# Altium PCB GateWay-NRF-version.PcbDoc
Units mm, origin at the board's own origin, x right, y up, seen from the top; angles counter-clockwise.
Board outline 119.76 x 151.64 mm, 2 copper layers (Top Layer, Bottom Layer); 41 components, 49 nets, 192 pads, 15 vias.
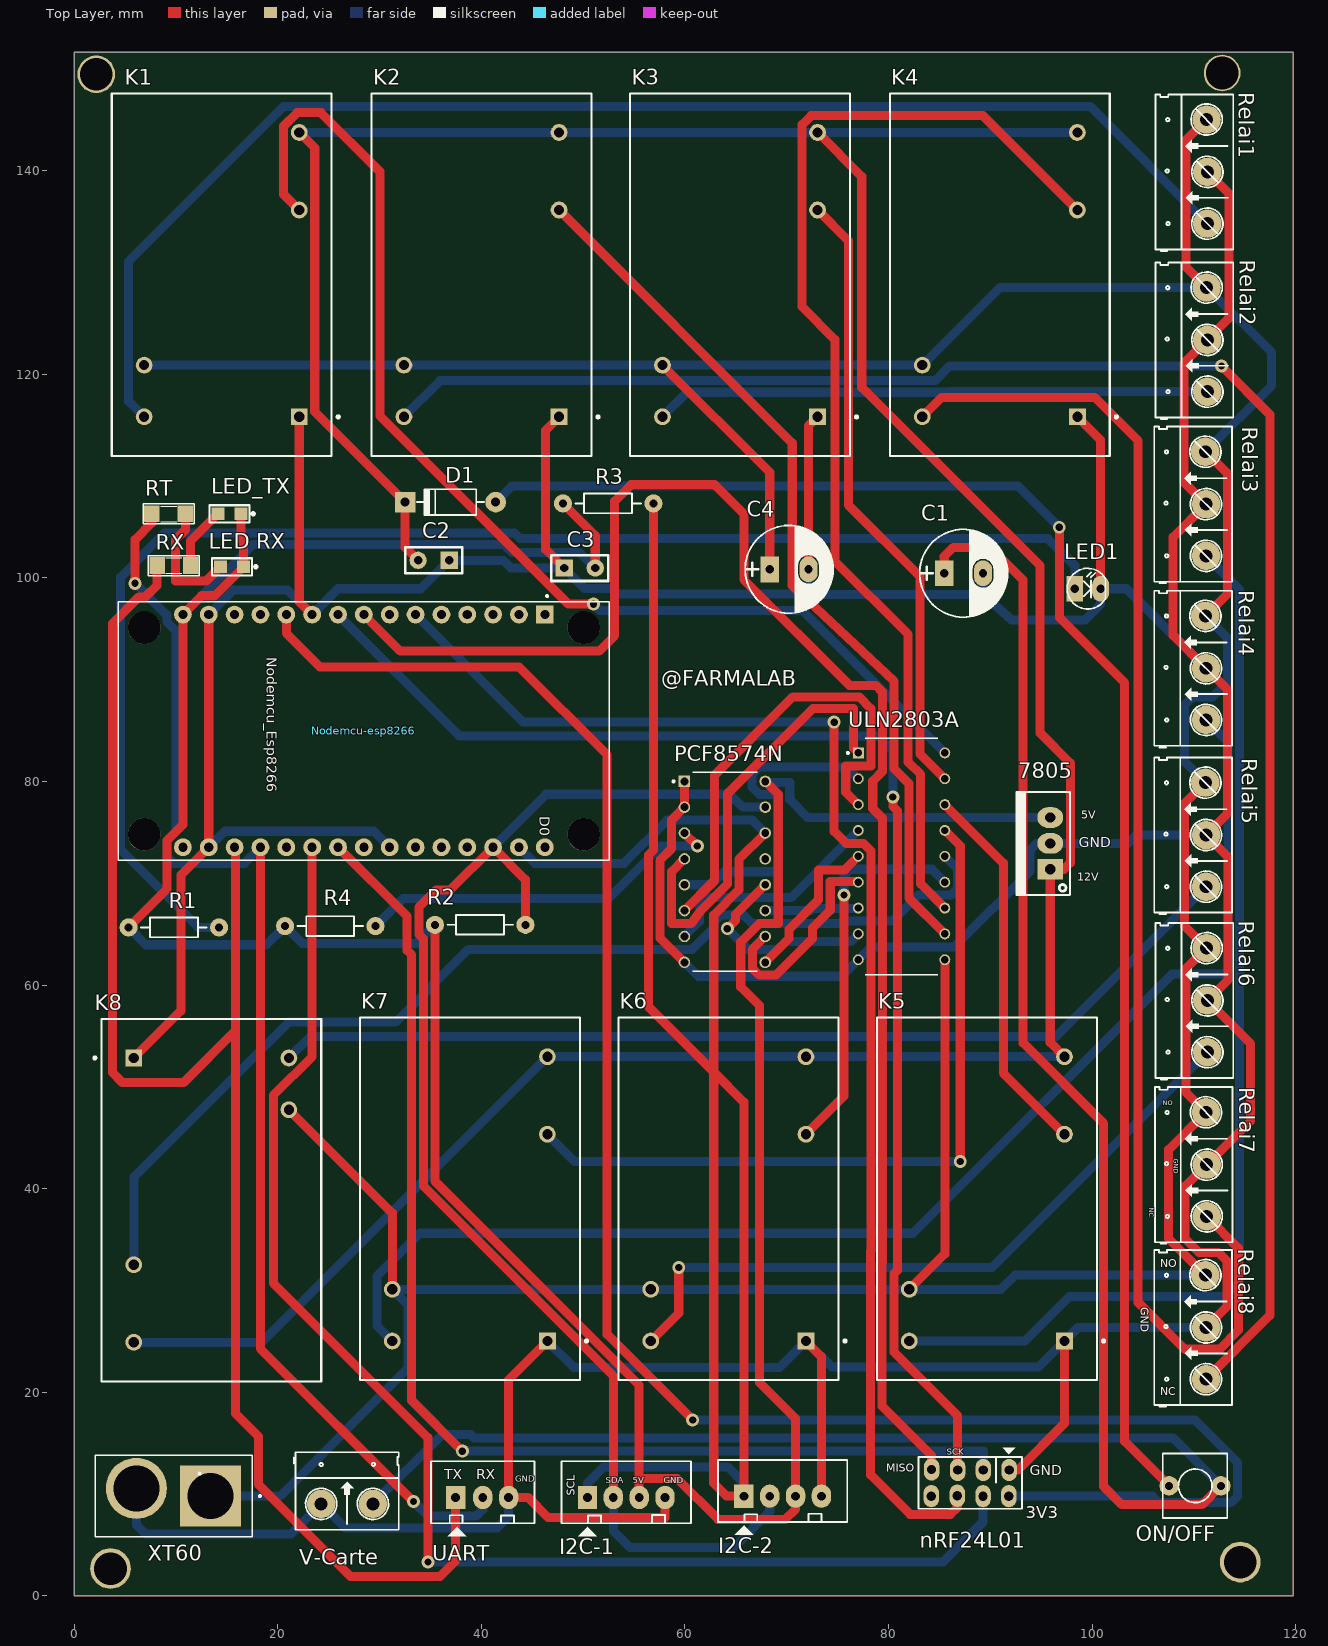
[diagram p0: Top Layer view]
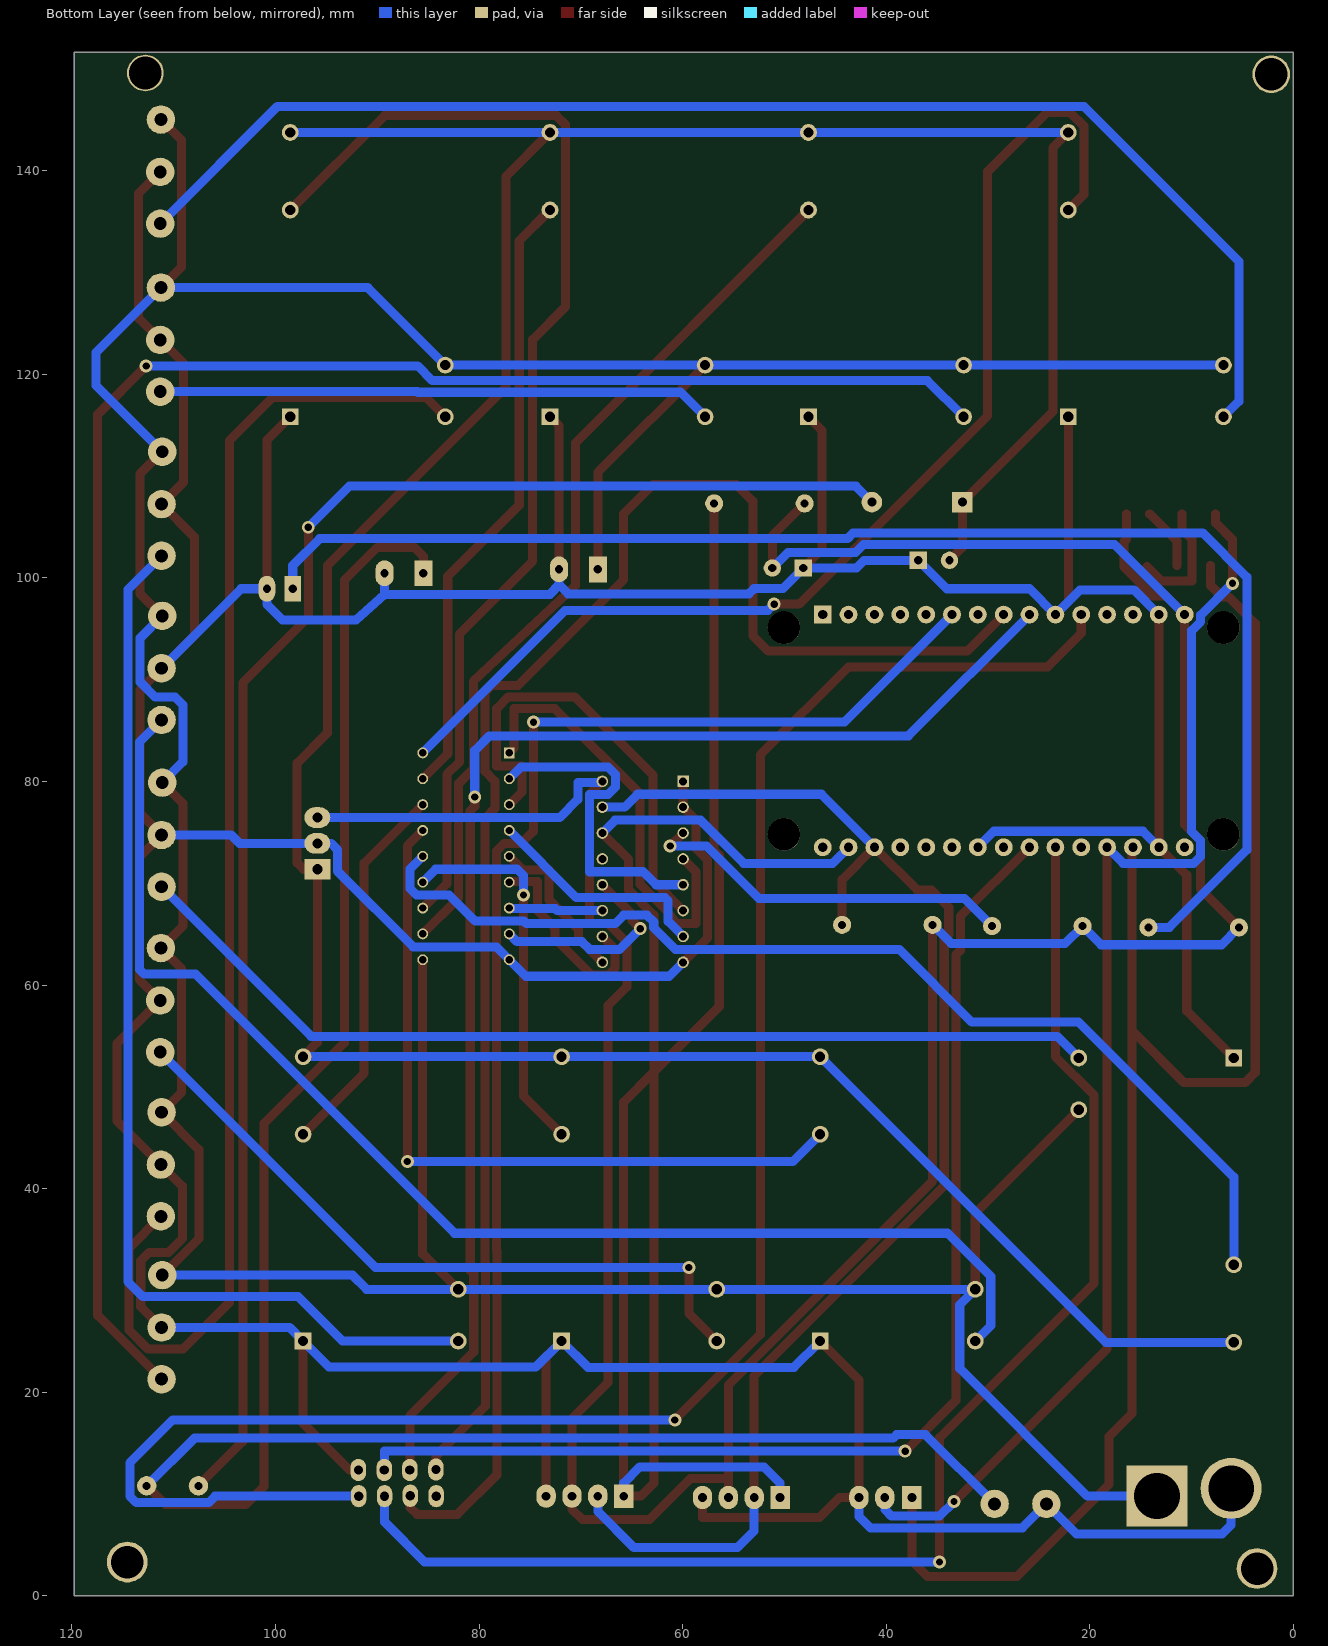
[diagram p1: Bottom Layer view, seen from below]
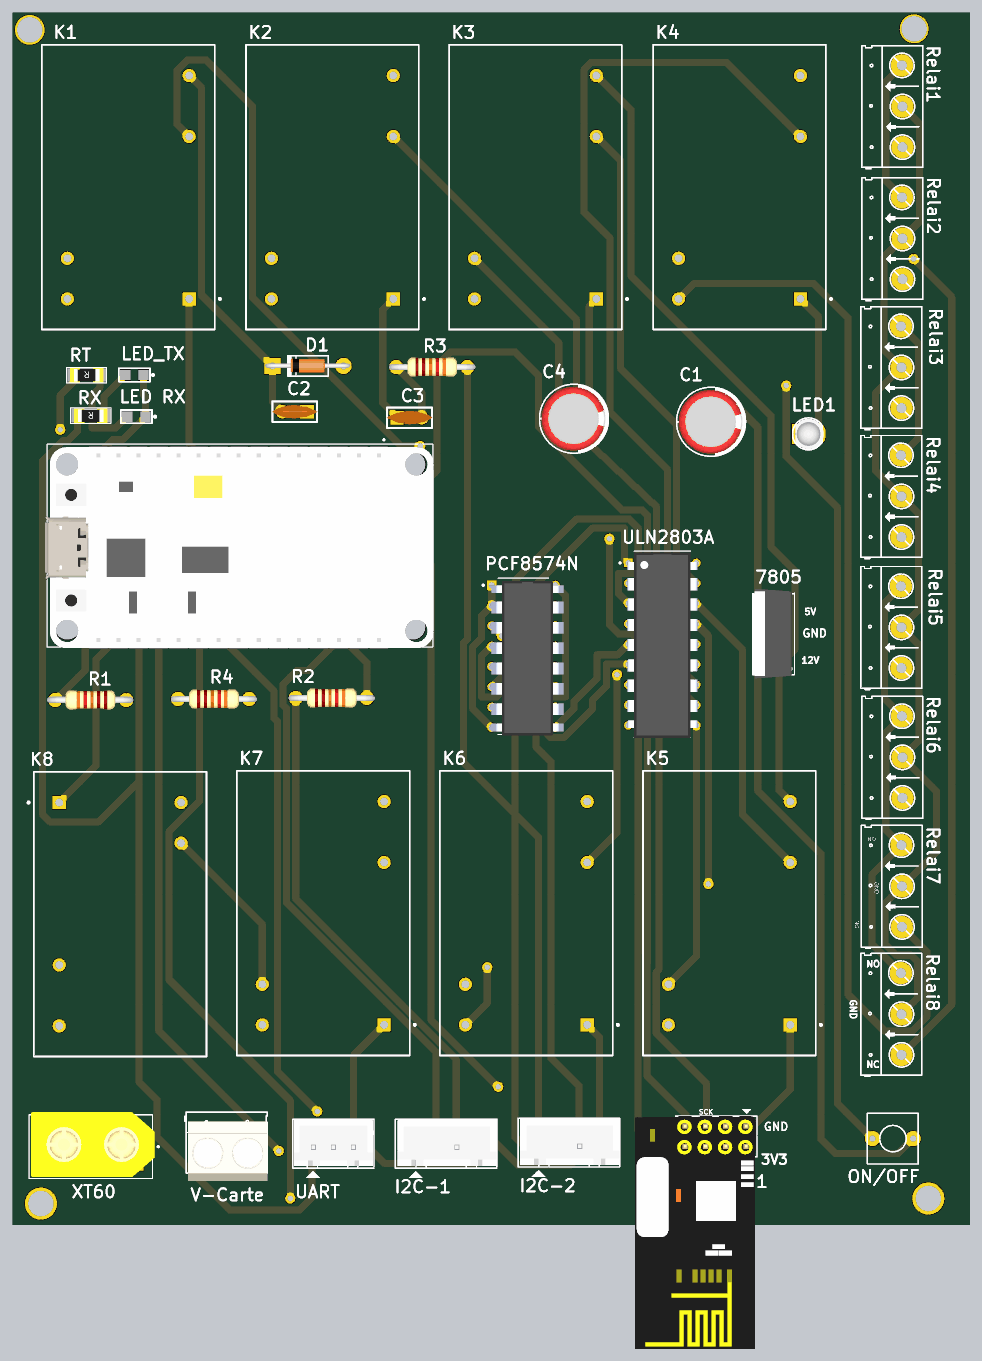
[diagram p2: 3D render of the assembled board from above, using the file's embedded part models]

## Layer stack, top to bottom
Top Solder: solder mask 0.0102, Solder Resist, Dk 3.5
Top Layer: signal copper 0.0356
Dielectric 1: dielectric 0.32, FR-4, Dk 4.8
Bottom Layer: signal copper 0.0356
Bottom Solder: solder mask 0.0102, Solder Resist, Dk 3.5

## Board outline
0,0 119.761,0 119.761,151.638 0,151.638

## Design rules (kind name [scope] priority, off if disabled: settings)
Clearance [All] p1: gap=0.254 ignorepadtopadclearanceinfootprint=FALSE except(0: Arc-Hole Track-Hole SMDPad-Hole THPad-Hole Via-Hole Fill-Hole Poly-Hole Region-Hole Text-Hole)
PolygonConnect [All] p1: connectstyle=Relief reliefconductorwidth=0.254 reliefentries=4 polygonreliefangle="90 Angle" airgapwidth=0.254
RoutingVias [All] p1: holewidth=0.711 width=1.27 viastyle="Through Hole" minholewidth=0.711 minwidth=1.27 maxholewidth=0.711 maxwidth=1.27
SolderMaskExpansion [All] p1: expansion=0.102
Width [All] p1: maxlimit=1.016 minlimit=0.635 preferedwidth=0.889
30 further rules are at their usual default settings.

## Classes and differential pairs
component class GateWay-NRF-version: 7805 C1 C2 C3 C4 D1 I2C-1 I2C-2 LED1 ON/OFF PCF8574N R1 R2 R3 R4 ULN2803A V-Carte XT60
component class GateWay-NRF-version-puissance: K1 K2 K3 K4 K5 K6 K7 K8 Relai1 Relai2 Relai3 Relai4 Relai5 Relai6 Relai7 Relai8
component class GateWay-NRF-version-commande: "LED RX" LED_TX Nodemcu-esp8266 nRF24L01 RT RX UART

## Components (designator, comment, footprint, x,y, rotation, side; value= is the part's Value field where it differs from the comment)
7805 "LM7805" QTO-220 95.885,71.374 r90 top
C1 "1000uF/16V" CP1.5/3.4 85.471,100.457 r0 top
C2 "Cap Non-pol" "Cap Non-Pol 3mm" 35.306,101.727 r180 top value=0.33uF
C3 "Cap Non-pol" "Cap Non-Pol 3mm" 49.657,100.965 r0 top value=0.1uF
C4 "1000uF/16V" CP1.5/3.4 68.326,100.838 r0 top
D1 "1N4007" D1A 41.402,107.442 r0 top
I2C-1 "I2C" CON4 50.419,9.652 r0 top value="Connector 4"
I2C-2 "I2C" CON4 65.786,9.779 r0 top value="Connector 4"
K1 "Relay" MODULE5B 14.478,129.794 r90 top
K2 "Relay" MODULE5B 40.005,129.794 r90 top
K3 "Relay" MODULE5B 65.405,129.794 r90 top
K4 "Relay" MODULE5B 90.932,129.794 r90 top
K5 "Relay" MODULE5B 89.662,38.989 r90 top
K6 "Relay" MODULE5B 64.262,38.989 r90 top
K7 "Relay" MODULE5B 38.862,38.989 r90 top
K8 "Relay" MODULE5B 13.462,38.862 r270 top
LED1 "LED" LED-3 98.298,98.933 r0 top value="LED 3 ly Single Colour"
"LED RX" "LED3" LED0805 15.494,101.092 r180 top
LED_TX "LED3" LED0805 15.24,106.299 r180 top
Nodemcu-esp8266 "ZC563900" *MODULE_ZC563900 28.448,84.963 r270 top
nRF24L01 "nRF24L01" nRF24L01 88.024,11.087 r180 top
ON/OFF "ON/OFF" SW2 112.649,10.795 r180 top value="SW chip 2 pin" (schematic designator ON/OFF1)
PCF8574N "PCF8574N" *DIP794W45P254L1969H508Q16 63.914,71.12 r0 top
R1 "560" R1/4W 5.334,65.659 r0 top value="R1/4W - 1K"
R2 "4.7k" R1/4W 44.323,65.913 r180 top value="R1/4W - 1K"
R3 "4.7k" R1/4W 56.896,107.315 r180 top value="R1/4W - 1K"
R4 "10k" R1/4W 29.591,65.786 r180 top value="R1/4W - 1K"
Relai1 "Header 3" HED3 111.319,134.807 r90 top
Relai2 "Header 3" HED3 111.319,118.297 r90 top
Relai3 "Header 3" HED3 111.192,102.168 r90 top
Relai4 "Header 3" HED3 111.192,86.039 r90 top
Relai5 "Header 3" HED3 111.192,69.656 r90 top
Relai6 "Header 3" HED3 111.319,53.4 r90 top
Relai7 "Header 3" HED3 111.258,37.271 r90 top
Relai8 "Header 3" HED3 111.192,21.269 r90 top
RT "220" SM-1206 9.271,106.299 r180 top value="R1/4W - 1K"
RX "220" SM-1206 9.779,101.219 r180 top value="R1/4W - 1K"
UART "UART" CON3 37.592,9.652 r0 top value="Connector 3"
ULN2803A "ULN2803A" *DIP850W46P254L2324H393Q18 81.28,72.644 r0 top
V-Carte "Header 2" HED2 24.257,9.017 r0 top
XT60 "XT60_YELLOW" *AMASS_XT60PB-M 9.779,9.779 r180 top

## Footprints (in the part's own frame and the unit in brackets; to place one, negate y for a bottom-side part, rotate by r counter-clockwise, add the part's x,y. Pads: shape width x height; smd on the part's side, far side on the other; paste and mask are expansions set on the pad)
*AMASS_XT60PB-M [mm]
  rect 6x6 hole 4.5: 1(-3.6,0)
  round 6 hole 4.5: 2(3.683,-0.762)
  silkscreen extent -8.55,-4 7.7,4, body extent -8,-4.32 7.5,4.06, height 16
*DIP794W45P254L1969H508Q16 [mm]
  rect 1.13x1.13 hole 0.78: 1(-3.97,8.89)
  round 1.13 hole 0.78: 2(-3.97,6.35) 3(-3.97,3.81) 4(-3.97,1.27) 5(-3.97,-1.27) 6(-3.97,-3.81) 7(-3.97,-6.35) 8(-3.97,-8.89) 9(3.97,-8.89) 10(3.97,-6.35) 11(3.97,-3.81) 12(3.97,-1.27) 13(3.97,1.27) 14(3.97,3.81) 15(3.97,6.35) 16(3.97,8.89)
  silkscreen extent -5.13,-9.77 3.18,9.77, body extent -4.95,-9.91 5.97,9.4, height 4.57
*DIP850W46P254L2324H393Q18 [mm]
  rect 1.07x1.07 hole 0.72: 1(-4.25,10.16)
  round 1.07 hole 0.72: 2(-4.25,7.62) 3(-4.25,5.08) 4(-4.25,2.54) 5(-4.25,0) 6(-4.25,-2.54) 7(-4.25,-5.08) 8(-4.25,-7.62) 9(-4.25,-10.16) 10(4.25,-10.16) 11(4.25,-7.62) 12(4.25,-5.08) 13(4.25,-2.54) 14(4.25,0) 15(4.25,2.54) 16(4.25,5.08) 17(4.25,7.62) 18(4.25,10.16)
  silkscreen extent -5.38,-11.62 3.55,11.62, body extent -4.37,-11.75 4.38,11.49, height 3.93
*MODULE_ZC563900 [mil]
  rect 69x69 hole 35: 1(-450,700)
  round 69 hole 35: 2(-450,600) 3(-450,500) 4(-450,400) 5(-450,300) 6(-450,200) 7(-450,100) 8(-450,0) 9(-450,-100) 10(-450,-200) 11(-450,-300) 12(-450,-400) 13(-450,-500) 14(-450,-600) 15(-450,-700) 16(450,-700) 17(450,-600) 18(450,-500) 19(450,-400) 20(450,-300) 21(450,-200) 22(450,-100) 23(450,0) 24(450,100) 25(450,200) 26(450,300) 27(450,400) 28(450,500) 29(450,600) 30(450,700)
  round 125.98 hole 125.98 unplated: None(-400,850) None(-400,-850) None(400,850) None(400,-850)
  silkscreen extent -526,-950 500,950, body extent -490,-960 510,954, height 190
"Cap Non-Pol 3mm" [mil] "Capacitor, Radial; Body 5.6 x 2.5 mm (L x W typ); Pin Spacing 3 mm (typ); Solder Pad 35mil"
  rect 67x67 hole 32: 1(-60,0)
  round 67 hole 32: 2(60,0)
  silkscreen extent -110,-50 110,50, body extent -115,-33 115,34, height 245
CON3 [mil] "CON 3"
  rect 75x90 hole 34: 1(-5,0)
  oval 75x90 hole 34: 2(100,0) 3(200,0)
  silkscreen extent -100,-150 300,140, body extent -95,-90 295,136, height 276
CON4 [mil] "CON4"
  rect 75x90 hole 34: 1(0,0)
  oval 75x90 hole 34: 2(100,0) 3(200,0) 4(300,0)
  silkscreen extent -100,-150 400,140, body extent -90,-90 398,136, height 276
CP1.5/3.4 [mil] "Tu hoa 220->470uF,16V, 470uF/16V,25V"
  rect 70x100 hole 32: 1(0,0)
  oval 70x100 hole 32: 2(150,0)
  silkscreen extent -95,-170 245,170, body extent -85,-157 230,157, height 446
D1A [mil] "Diode 1A, W 100mil, L 350mil"
  round 80 hole 35: 1(0,0)
  rect 80x80 hole 35: 2(-350,0)
  silkscreen extent -305,-50 -45,50, body extent -386,-33 34,36, height 84
HED2 [mil] "Header 2, 2 pin, hight 300mil, Pin to Pin 200, Colour Green"
  round 110 hole 50: 1(0,0) 2(200,0)
  silkscreen extent -106,-100 300,200, body extent -92,-140 302,155, height 394
HED3 [mil] "Header 3, 3 pin, hight 300mil, Pin to Pin 200, Colour Green"
  round 110 hole 50: 1(0,0) 2(200,0) 3(402.62,2.62)
  silkscreen extent -106,-100 500,200
LED0805 [mil] "Chip Resistor; Body 2.0 x 1.3 mm (LxW typ)"
  rect 50x50 smd: 1(-45,0) 2(45,0)
  silkscreen extent -97,-33 77,33, body extent -60,-25 60,25, height 47
LED-3 [mil] "LED 2 PIN, 3ly Only colour"
  rect 65x100 hole 32: 1(0,0)
  oval 65x100 hole 32: 2(100,0)
  silkscreen extent -29,-78 118,79, body extent -13,-75 125,75, height 217
MODULE5B [mm] "DIP; 5 Round Pins; Row Space 15.24 mm; Pitch 2.54 mm"
  rect 1.65x1.65 hole 1: 1(-13.97,-7.62)
  round 1.65 hole 1: 2(-13.97,7.62) 3(-8.89,7.62) 4(13.97,-7.62) 5(6.35,-7.62)
  silkscreen extent -17.8,-11.58 17.8,10.8, body extent -17.8,-10.8 17.8,10.8, height 14
nRF24L01 [mil] "Connector 4x2"
  oval 60x86 hole 36: 1(-150.5,-49.5) 2(-149.5,51.5) 3(-50.5,-49.5) 4(-49.5,51.5) 5(48.5,-49.5) 6(50,50) 7(149.5,-51.5) 8(150.5,51.5)
  silkscreen extent -200,-135 200,101, body extent -197,-100 399,1048, height 407
QTO-220 [mil] "TO-220 - 1-2-3"
  rect 80x100 hole 39: 1(0,0)
  oval 80x100 hole 39: 2(100,0) 3(200,0)
  silkscreen extent -100,-76 300,130, body extent -119,-64 322,121, height 755
R1/4W [mil] "R 1/4W, 2 Pin, 350mil"
  round 70 hole 31: 1(0,0) 2(350,0)
  silkscreen extent 48,-38 302,38, body extent -40,-47 386,47, height 111
SM-1206 [mil] "Compoment SMD 120x60mil"
  rect 60x65 smd: 1(-65,0) 2(65,0)
  silkscreen extent -99,-38 99,39, body extent -83,-35 83,36, height 25
SW2 [mil] "SW button 2pin, 250x 250 mil"
  round 75 hole 31: 1(0,0) 2(200,0)
  silkscreen extent -25,-125 225,125

## Part data
7805: library part LM78xx_1, "On ap +, from + 5 to + 24VDC", =LM7808
C1 C4: library part CP4, "Cap 1000uF/16V - 220uF/50V", Description 1="2200uF-3300uF/6,3V - 1000uF-2200uF/10V", Description 2="1000uF/16V - 470uF => 1000uF/25V - 100uF/100V", Description 3=330uF>470uF/35V_220uF>470uF/50V_10uF>22uF/250V, Description 4="220uF => 330uF/63V - 10uF =>33uF/160 - 200V", Description 5="4,7uF>10uF/250V_3,3uF>10uF/400V - 2,2uF>4,7uF/450V"
C2 C3: "Non-polarized Capacitor", LatestRevisionDate=17-Jul-2002, LatestRevisionNote="Re-released for DXP Platform.", PackageReference=RAD-0.3, Published=8-Jun-2000, Publisher="Altium Limited"
D1: library part D1A, "Diode 1A"
I2C-1 I2C-2: library part Con4, "Connector 4"
K1 K2 K3 K4 K5 K6 K7 K8: "SPDT Relay", LatestRevisionDate=17-Jul-2002, LatestRevisionNote="Re-released for DXP Platform.", PackageReference=MODULE5B, Published=8-Jun-2000, Publisher="Altium Limited"
LED1: "LED Single colour Green and Red"
"LED RX" LED_TX: library part LEDSMD, "LED 3mm"
Nodemcu-esp8266: "NodeMcu Lua ESP8266 WIFI Internet of Things Network Development Module Board", Package=None, Availability=Unavailable, MF=YKS, MP=ZC563900, Price=None, SnapEDA_Link=https://www.snapeda.com/parts/ZC563900/YKS/view-part/607853/?ref=snap
ON/OFF: library part SW2, "Switch button 2 pin"
PCF8574N: "Remote 8-Bit I/O Expander for I2C-Bus 16-PDIP -40 to 85", Package="PDIP-16 Texas Instruments", Availability=Good, BuyPart=https://www.snapeda.com/parts/PCF8574N/Texas%20Instruments/view-part/271889/?ref=eda, DigiKey-Purchase-URL=https://snapeda.com/shop?store=DigiKey&id=271889, MF="Texas Instruments", Mouser-Purchase-URL=https://snapeda.com/shop?store=Mouser&id=271889, MP=PCF8574N, Price=None, SnapEDA_Link=https://www.snapeda.com/parts/PCF8574N/Texas%20Instruments/view-part/271889/?ref=snap, Texas_Instruments-Purchase-URL=https://snapeda.com/shop?store=Texas+Instruments&id=271889
R1 R2 R3 R4: library part R1/4W, "Resistor 1/4W"
Relai1 Relai2 Relai3 Relai4 Relai5 Relai6 Relai7 Relai8: library part Hed3, "Header 3 (Green)"
RT RX: library part R, "Resistor 1/4W"
UART: library part Con3, "Connector 3"
ULN2803A: "Bipolar (BJT) Transistor Array 8 NPN Darlington 50V 500mA 2.25W Through Hole 18-DIP", Package="DIP-18 STMicroelectronics", BuyPart=https://www.snapeda.com/parts/ULN2803A/STMicroelectronics/view-part/697285/?ref=eda, Digi-Key_Part_Number=497-2356-5-ND, MF=STMicroelectronics, MP=ULN2803A, SnapEDA_Link=https://www.snapeda.com/parts/ULN2803A/STMicroelectronics/view-part/697285/?ref=snap
V-Carte: library part Hed2, "Header 2 (Green)"
XT60: library part XT60, "Power connector; 65A; PIN: 2; Colour: yellow-Male", Package=None, Availability=Unavailable, MF=Pololu, MP="XT60 YELLOW", Price=None, SnapEDA_Link=https://www.snapeda.com/parts/XT60%20YELLOW/Pololu/view-part/423230/?ref=snap

## Free pads (board coordinates)
  round 4 hole 3.2: 10(114.554,3.302) 13(3.556,2.667)
  round 3.6 hole 3.2: 11(112.776,149.606)
  round 3.7 hole 3.2: 12(2.159,149.479)

## Via types
v1: diameter 1.27, hole 0.711, Top Layer to Bottom Layer, 15 vias

## Nets (pads, with @x,y where several pads share a name; then routed paths per layer and width w, separated by ;. In a path a pad name is that pad's centre, name@x,y a point inside that pad or via, vN(x,y) a via of type N, cw(c..) or ccw(c..) an arc to the next point about the centre after c; other vN are vias at no path point)
3V3: Nodemcu-esp8266.11 nRF24L01.2 | length 188.7
  Top Layer w0.889: Nodemcu-esp8266.11 20.828,94.564 24.13,91.262 43.688,91.262 52.349,82.601 52.349,25.679 v1(60.757,17.272)
  Bottom Layer w0.889: v1(60.757,17.272) 110.084,17.272 114.3,13.056 114.3,9.779 113.665,9.144 106.553,9.144 105.918,9.779 nRF24L01.2
5V: 7805.3 "LED RX.1" C3.2 I2C-1.3 I2C-2.3 LED_TX.1 Nodemcu-esp8266.15 PCF8574N.16 R1.1 R2.2 R3.2 R4.2 | length 320.5
  Top Layer w0.889: R1.1 9.093,69.418 9.093,74.185 10.668,75.76 Nodemcu-esp8266.15 12.522,98.247 13.792,98.247 16.637,101.092 16.637,103.556 16.383,103.81 LED_TX.1 ; R2.2 35.433,40.742 55.499,20.676 55.499,11.506 ; R3.2 51.181,104.14 C3.2 ; I2C-1.3 55.499,11.506 ; PCF8574N.16 69.164,78.73 69.164,66.04 67.31,66.04 65.477,64.207 65.477,59.823 67.335,57.965 67.335,20.93 70.866,17.399 I2C-2.3 70.866,8.509 69.85,7.493 63.246,7.493 59.233,11.506 55.499,11.506
  Bottom Layer w0.889: R1.1 7.036,63.957 18.872,63.957 R4.2 22.403,64.084 33.604,64.084 R2.2 ; Nodemcu-esp8266.15 17.551,103.276 42.24,103.276 43.002,102.514 49.632,102.514 C3.2 ; PCF8574N.16 68.017,79.877 70.291,79.877 70.291,78.238 72.074,76.454 7805.3
12V: 7805.1 C2.2 D1.2 K1.4 K2.4 K3.4 K4.4 K5.4 K6.4 K7.4 K8.4 | length 329.7
  Top Layer w0.889: K1.4 23.622,142.24 23.622,116.332 D1.2 32.512,102.997 C2.2 ; K3.4 77.368,139.421 77.368,118.72 94.894,101.194 94.894,84.76 97.866,81.788 97.866,72.009 97.231,71.374 7805.1 95.885,54.356 K5.4
  Bottom Layer w0.889: K8.4 18.415,24.892 K7.4 K6.4 K5.4 ; K1.4 K2.4 K3.4 K4.4
12V6: C4.1 K1.3 K2.3 K3.3 K4.3 K5.3 K6.3 K7.3 K8.3 Relai1.3 Relai2.3 Relai3.3 Relai4.3 Relai5.3 Relai6.3 Relai7.3 Relai8.3 ULN2803A.10 XT60.1 | length 434.6
  Top Layer w0.889: K8.3 31.242,37.592 K7.3 ; K3.3 68.326,110.363 C4.1 ; K5.3 85.53,33.587 ULN2803A.10 ; Relai8.3 111.1,31.496 107.518,35.077 107.518,43.825 Relai7.3 109.22,49.47 109.22,61.595 Relai6.3 109.093,65.786 109.093,77.851 Relai5.3 ; Relai4.3 113.309,98.45 113.309,110.211 Relai3.3 ; Relai2.3 109.22,130.556 109.22,143.002 Relai1.3
  Bottom Layer w0.889: K1.3 K2.3 K3.3 K4.3 90.932,128.524 Relai2.3 117.627,122.149 117.627,118.897 Relai3.3 ; XT60.1 20.218,9.779 32.766,22.327 32.766,28.575 K7.3 K6.3 K5.3 91.034,30.099 92.431,31.496 Relai8.3 ; Relai5.3 109.093,81.915 109.093,87.528 109.855,88.29 111.811,88.29 113.309,89.789 113.309,94.082 Relai4.3
CE: Nodemcu-esp8266.22 nRF24L01.3 | length 117.4
  Top Layer w0.889: Nodemcu-esp8266.22 32.703,66.739 32.703,63.398 33.147,62.954 33.147,19.177 v1(38.125,14.199)
  Bottom Layer w0.889: v1(38.125,14.199) 89.306,14.199 nRF24L01.3
CSN: Nodemcu-esp8266.21 nRF24L01.4 | length 136.8
  Top Layer w0.889: Nodemcu-esp8266.21 23.368,52.959 19.558,49.149 19.558,30.709 34.747,15.519 v1(34.747,3.302)
  Bottom Layer w0.889: v1(34.747,3.302) 85.344,3.302 89.281,7.239 nRF24L01.4
D0: Nodemcu-esp8266.30
D3: Nodemcu-esp8266.27
D4: Nodemcu-esp8266.26
D5: Nodemcu-esp8266.23
GND: 7805.2 C1.2 C2.1 C3.1 C4.2 I2C-1.4 I2C-2.4 K1.1 K2.1 K3.1 K4.1 K5.1 K6.1 K7.1 K8.1 LED1.2 Nodemcu-esp8266.10 Nodemcu-esp8266.14 Nodemcu-esp8266.17 Nodemcu-esp8266.24 nRF24L01.1 PCF8574N.1 PCF8574N.2 PCF8574N.8 Relai1.2 Relai2.2 Relai3.2 Relai4.2 Relai5.2 Relai6.2 Relai7.2 Relai8.2 UART.3 ULN2803A.9 V-Carte.1 XT60.2 | length 640.3
  Top Layer w0.889: K8.1 10.465,57.455 10.465,70.79 Nodemcu-esp8266.17 Nodemcu-esp8266.14 ; K1.1 22.098,97.663 Nodemcu-esp8266.10 ; K7.1 42.672,21.209 UART.3 44.577,9.652 46.533,7.696 58.039,7.696 I2C-1.4 ; K2.1 46.304,114.503 46.304,102.794 C3.1 ; PCF8574N.8 57.537,64.637 57.537,72.257 58.674,73.393 58.674,76.2 PCF8574N.2 PCF8574N.1 ; K6.1 73.406,23.495 I2C-2.4 ; C4.2 72.136,114.935 K3.1 ; nRF24L01.1 92.71,12.344 97.282,16.916 K5.1 ; K4.1 100.838,113.538 LED1.2 ; Relai8.2 113.233,28.391 113.233,32.893 112.395,33.731 110.49,33.731 109.144,35.077 109.144,40.237 Relai7.2 115.57,46.663 115.57,54.229 Relai6.2 113.36,60.522 113.36,72.568 Relai5.2 113.309,76.854 113.309,89.002 Relai4.2 107.953,94.358 107.953,104.01 Relai3.2 109.017,109.423 109.017,121.076 Relai2.2 113.436,125.495 113.436,137.77 Relai1.2
  Bottom Layer w0.889: XT60.2 6.096,6.96 6.985,6.071 21.311,6.071 V-Carte.1 26.607,6.667 41.542,6.667 42.672,7.798 UART.3 ; Nodemcu-esp8266.17 14.783,75.108 29.413,75.108 Nodemcu-esp8266.24 ; Nodemcu-esp8266.14 15.646,98.831 20.93,98.831 Nodemcu-esp8266.10 25.908,98.933 34.036,98.933 C2.1 42.164,101.727 42.926,100.965 C3.1 50.152,98.946 52.959,98.946 53.48,98.425 71.247,98.425 72.136,99.314 ; K7.1 49.073,22.428 69.291,22.428 K6.1 74.447,22.454 94.717,22.454 K5.1 98.613,26.35 Relai8.2 ; PCF8574N.8 61.316,60.858 75.404,60.858 ULN2803A.9 78.3,63.754 86.462,63.754 93.904,71.196 93.904,73.279 94.539,73.914 7805.2 103.53,73.914 104.353,74.737 Relai5.2 ; C4.2 72.136,99.314 ; C1.2 89.281,98.374 ; Relai4.2 103.378,98.933 LED1.2 100.838,97.409 99.289,95.86 92.1,95.86 89.281,98.374 ; 72.136,99.314 73.025,98.374 89.281,98.374
MISO: Nodemcu-esp8266.8 nRF24L01.7 | length 158.4
  Top Layer w0.889: Nodemcu-esp8266.8 32.029,92.812 51.562,92.812 53.086,94.336 53.086,107.544 54.712,109.169 62.916,109.169 65.786,106.299 65.786,99.822 76.162,89.446 78.74,89.446 79.407,88.78 79.407,80.994 78.448,80.035 78.448,77.343 79.407,76.384 79.407,32.766 79.375,32.734 79.375,18.618 84.226,13.767 nRF24L01.7
MOSI: Nodemcu-esp8266.6 nRF24L01.6 | length 133.5
  Top Layer w0.889: v1(74.653,85.827) 74.653,75.105 75.844,73.914 77.521,73.914 78.264,73.171 78.264,33.909 78.232,33.877 78.232,11.874 82.118,7.988 86.081,7.988 86.754,8.661 nRF24L01.6
  Bottom Layer w0.889: Nodemcu-esp8266.6 44.094,85.827 v1(74.653,85.827)
NetC1_1: C1.1 ON/OFF.1 V-Carte.2 | length 204.7
  Top Layer w0.889: C1.1 85.471,102.108 86.36,102.997 89.992,102.997 93.218,99.771 93.218,54.305 101.117,46.406 101.117,10.744 102.921,8.941 110.795,8.941 ON/OFF.1
  Bottom Layer w0.889: V-Carte.2 36.153,15.833 38.966,15.833 39.305,15.494 107.95,15.494 ON/OFF.1
NetD1_1: D1.1 ON/OFF.2 | length 156.4
  Top Layer w0.889: v1(96.774,104.978) 96.774,96.114 103.2,89.687 103.2,15.164 ON/OFF.2
  Bottom Layer w0.889: D1.1 42.977,109.017 92.735,109.017 v1(96.774,104.978)
NetK1_2: K1.2 Relai1.1 | length 133
  Bottom Layer w0.889: K1.2 5.334,117.348 5.334,131.089 20.574,146.329 99.797,146.329 Relai1.1
NetK2_2: K2.2 Relai8.1 | length 186.5
  Top Layer w0.889: Relai8.1 117.475,27.553 117.475,116.053 v1(112.7,120.828)
  Bottom Layer w0.889: K2.2 35.941,119.38 84.582,119.38 86.03,120.828 v1(112.7,120.828)
NetK3_2: K3.2 Relai2.1 | length 54.6
  Bottom Layer w0.889: K3.2 60.198,118.237 85.979,118.237 86.039,118.298 Relai2.1
NetK4_2: K4.2 Relai7.1 | length 133.4
  Top Layer w0.889: K4.2 85.217,117.729 100.254,117.729 104.521,113.462 104.521,28.804 109.093,24.232 112.522,24.232 114.376,26.086 114.376,34.153 Relai7.1
NetK5_2: K5.2 Relai3.1 | length 107.6
  Bottom Layer w0.889: K5.2 93.396,25.019 97.765,29.388 113.03,29.388 114.503,30.861 114.503,98.857 Relai3.1
NetK6_2: K6.2 Relai6.1 | length 69.1
  Top Layer w0.889: K6.2 59.385,27.762 v1(59.385,32.233)
  Bottom Layer w0.889: v1(59.385,32.233) 90.151,32.233 Relai6.1
NetK7_2: K7.2 Relai4.1 | length 128.5
  Bottom Layer w0.889: K7.2 29.718,26.543 29.718,31.369 33.96,35.611 82.398,35.611 107.848,61.062 112.878,61.062 113.36,61.544 113.36,83.871 Relai4.1
NetK8_2: K8.2 Relai5.1 | length 97.1
  Bottom Layer w0.889: K8.2 23.209,54.959 96.494,54.959 Relai5.1
NetLED1_1: LED1.1 R1.2 | length 138.8
  Bottom Layer w0.889: R1.2 12.167,65.659 4.547,73.279 4.547,100.076 8.89,104.419 43.237,104.419 43.796,103.861 95.656,103.861 98.298,101.219 LED1.1
"NetLED RX_2": "LED RX.2" RT.1 | length 12
  Top Layer w0.889: RT.1 10.922,104.75 9.957,103.784 9.957,99.695 12.954,99.695 14.351,101.092
NetLED_TX_2: LED_TX.2 RX.1 | length 6.2
  Top Layer w0.889: RX.1 11.43,103.632 LED_TX.2
NetPCF8574N_3: PCF8574N.3 R4.1 | length 36.7
  Top Layer w0.889: PCF8574N.3 v1(61.214,73.66)
  Bottom Layer w0.889: R4.1 32.283,68.478 52.476,68.478 57.658,73.66 v1(61.214,73.66)
NetPCF8574N_4: PCF8574N.4 ULN2803A.1 | length 43.3
  Top Layer w0.889: PCF8574N.4 58.68,71.126 58.68,66.046 60.609,66.046 61.492,67.242 64.16,69.91 64.16,78.765 72.555,87.16 76.543,87.16 76.543,83.291 ULN2803A.1
NetPCF8574N_5: PCF8574N.5 ULN2803A.2 | length 32.6
  Bottom Layer w0.889: PCF8574N.5 62.598,69.85 63.875,71.126 69.148,71.126 69.148,78.734 67.31,78.734 66.599,79.445 66.599,80.696 67.31,81.407 75.887,81.407 ULN2803A.2
NetPCF8574N_6: PCF8574N.6 ULN2803A.3 | length 46
  Top Layer w0.889: PCF8574N.6 62.9,70.266 62.9,80.604 70.599,88.303 77.121,88.303 78.264,87.16 78.264,81.498 75.796,81.498 75.796,78.958 ULN2803A.3
NetPCF8574N_7: PCF8574N.7 ULN2803A.4 | length 22.6
  Bottom Layer w0.889: PCF8574N.7 61.421,66.247 61.421,68.264 61.744,68.586 70.432,68.586 ULN2803A.4
NetPCF8574N_9: PCF8574N.9 ULN2803A.5 | length 15.7
  Top Layer w0.889: PCF8574N.9 70.234,64.58 70.234,65.473 73.114,68.353 73.114,71.31 75.697,71.31 ULN2803A.5
NetPCF8574N_10: PCF8574N.10 ULN2803A.6 | length 20.5
  Top Layer w0.889: PCF8574N.10 66.62,63.506 66.62,61.656 67.31,60.966 68.929,60.966 72.542,64.58 72.542,65.616 74.273,67.346 74.272,70.168 76.94,70.168 76.94,70.104 ULN2803A.6
NetPCF8574N_11: PCF8574N.11 ULN2803A.7 | length 9.3
  Bottom Layer w0.889: PCF8574N.11 72.314,67.31 72.504,67.501 76.94,67.501 76.94,67.564 ULN2803A.7
NetPCF8574N_12: PCF8574N.12 ULN2803A.8 | length 20.2
  Top Layer w0.889: v1(64.16,65.532) 64.969,66.341 64.969,66.935 PCF8574N.12
  Bottom Layer w0.889: v1(64.16,65.532) 66.192,63.5 69.139,63.5 69.901,64.262 76.268,64.262 ULN2803A.8
Relai1: K1.5 ULN2803A.18 | length 114.5
  Top Layer w0.889: K1.5 20.574,137.668 20.574,144.399 21.895,145.72 24.232,145.72 30.023,139.929 30.023,115.951 48.552,97.422 v1(51.003,97.422)
  Bottom Layer w0.889: v1(51.003,97.422) 51.625,96.799 71.535,96.799 ULN2803A.18
Relai2: K3.5 ULN2803A.17 | length 61.1
  Top Layer w0.889: K3.5 76.048,133.121 76.048,107.163 83.072,100.139 83.072,82.722 ULN2803A.17
Relai3: K5.5 ULN2803A.16 | length 37.3
  Top Layer w0.889: ULN2803A.16 91.288,71.966 91.288,51.333 K5.5
Relai4: K7.5 ULN2803A.15 | length 74.8
  Top Layer w0.889: ULN2803A.15 87.046,73.668 v1(87.046,42.647)
  Bottom Layer w0.889: K7.5 49.174,42.647 v1(87.046,42.647)
Relai5: K8.5 ULN2803A.14 | length 106
  Bottom Layer w0.889: K8.5 5.842,41.123 21.082,56.363 31.572,56.363 38.71,63.5 60.699,63.5 62.83,65.632 62.83,66.205 63.5,66.874 65.786,66.874 66.62,66.04 75.336,66.04 75.565,66.269 80.366,66.269 82.931,68.834 86.136,68.834 86.771,69.469 86.771,71.403 ULN2803A.14
Relai6: K6.5 ULN2803A.13 | length 37.6
  Top Layer w0.889: K6.5 75.616,49.073 v1(75.616,68.834)
  Bottom Layer w0.889: v1(75.616,68.834) 75.616,70.739 76.251,71.374 84.26,71.374 ULN2803A.13
Relai7: K4.5 ULN2803A.12 | length 114
  Top Layer w0.889: ULN2803A.12 83.147,69.947 83.147,80.689 81.929,81.908 81.929,94.449 74.727,101.651 74.727,123.419 71.501,126.644 71.501,144.526 72.39,145.415 89.281,145.415 K4.5
Relai8: K2.5 ULN2803A.11 | length 87
  Top Layer w0.889: K2.5 70.536,113.233 70.536,99.238 80.55,89.834 80.55,81.255 82.004,79.8 82.004,68.55 ULN2803A.11
RX: Nodemcu-esp8266.19 RT.2 UART.2 | length 125.9
  Top Layer w0.889: v1(5.969,99.466) 5.969,103.759 7.62,105.41 RT.2 ; Nodemcu-esp8266.19 18.288,24.282 v1(33.325,9.246)
  Bottom Layer w0.889: v1(5.969,99.466) 9.093,96.342 9.093,95.707 9.982,94.818 9.982,75.074 9.093,74.185 9.093,72.644 9.779,71.958 16.713,71.958 Nodemcu-esp8266.19 ; v1(33.325,9.246) 34.76,7.81 39.472,7.81 40.132,8.471 UART.2
SCK: Nodemcu-esp8266.9 nRF24L01.5 | length 133.7
  Top Layer w0.889: v1(80.416,78.46) 80.416,77.559 80.861,77.115 80.861,31.965 80.518,31.623 80.518,23.952 86.792,17.678 nRF24L01.5
  Bottom Layer w0.889: Nodemcu-esp8266.9 37.821,84.48 78.969,84.48 80.416,83.033 v1(80.416,78.46)
SCL: I2C-1.1 I2C-2.1 Nodemcu-esp8266.29 PCF8574N.14 R3.1 | length 217.6
  Top Layer w0.889: R3.1 56.896,73.254 56.394,72.752 56.394,57.887 62.827,51.454 ; PCF8574N.14 65.303,72.349 65.303,69.351 62.827,66.874 62.827,51.454 ; 62.827,51.454 62.827,11.049 64.097,9.779 I2C-2.1 65.786,48.495 62.827,51.454
  Bottom Layer w0.889: Nodemcu-esp8266.29 45.263,71.958 54,71.958 58.236,76.194 66.62,76.194 PCF8574N.14 ; I2C-1.1 50.419,11.049 52.019,12.649 64.186,12.649 65.786,11.049 I2C-2.1
SDA: I2C-1.2 I2C-2.2 Nodemcu-esp8266.28 PCF8574N.15 R2.1 | length 136.3
  Top Layer w0.889: R2.1 44.323,70.358 Nodemcu-esp8266.28 36.957,69.342 35.56,69.342 33.846,67.627 33.846,64.986 34.29,64.541 34.29,40.259 52.959,21.59 I2C-1.2
  Bottom Layer w0.889: Nodemcu-esp8266.28 46.355,78.74 64.414,78.74 65.684,77.47 PCF8574N.15 ; I2C-1.2 52.959,6.375 54.61,4.724 64.77,4.724 68.326,8.28 I2C-2.2
SS: Nodemcu-esp8266.7
TX: Nodemcu-esp8266.18 RX.2 UART.1 | length 160.2
  Top Layer w0.889: RX.2 8.128,99.263 6.985,98.12 6.35,98.12 3.734,95.504 3.734,51.41 4.724,50.419 10.744,50.419 15.824,55.499 ; Nodemcu-esp8266.18 15.824,73.457 15.824,55.499 ; UART.1 37.465,3.429 35.916,1.88 27.153,1.88 18.085,10.947 18.085,15.646 15.824,17.907 15.824,55.499
pads on no net: Nodemcu-esp8266.1 Nodemcu-esp8266.2 Nodemcu-esp8266.3 Nodemcu-esp8266.4 Nodemcu-esp8266.5 Nodemcu-esp8266.12 Nodemcu-esp8266.13 Nodemcu-esp8266.16 Nodemcu-esp8266.20 Nodemcu-esp8266.25 Nodemcu-esp8266.None nRF24L01.8 PCF8574N.13

## Polygon pours and split planes (outlines as drawn)
GND on Top Layer (solid, pour order 0): 0,0 119.761,0 119.761,151.638 0,151.638
GND on Bottom Layer (solid, pour order 1): 0,0 119.761,0 119.761,151.638 0,151.638

## Silkscreen, mask and mechanical layers (free items; w line width, h text height)
Top Overlay:
  text "@FARMALAB" at 57.658,89.408 h1.52
  text "D0" at 45.72,76.581 h1 r270
  text "5V" at 98.933,76.327 h0.8
  text "GND" at 98.679,73.533 h1
  text "12V" at 98.552,70.231 h0.8
  text "NO" at 106.934,48.006 h0.8
  text "GND" at 107.823,42.926 h0.8 r270
  text "NC" at 105.41,38.1 h0.8 r270
  text "NO" at 106.68,32.258 h0.8
  text "GND" at 104.775,28.321 h0.8 r270
  text "NC" at 106.68,19.685 h0.8
  text "SCK" at 85.725,13.843 h0.6
  text "MISO" at 79.756,12.192 h0.8
  text "GND" at 93.853,11.811 h1
  text "TX" at 36.322,11.43 h1
  text "RX" at 39.497,11.43 h1
  text "GND" at 43.307,11.176 h0.6
  text "SDA" at 52.197,11.049 h0.6
  text "5V" at 54.864,11.049 h0.6
  text "GND" at 57.912,11.049 h0.6
  text "SCL" at 49.149,9.817 h0.8 r90
  text "3V3" at 93.472,7.62 h1.2
Mechanical 1:
  text "ACE" at 43.688,57.15 h2.2 r45
Drill Drawing:
  lines w0.254: 0,0 1.524,0 116.078,0 119.761,0 119.761,151.638 0,151.638 0,0

## Text inside footprints (layer, text, board x,y; h text height)
Nodemcu-esp8266: Top Overlay "Nodemcu_Esp8266" at 18.923,92.202 h1 r270